# Altium PCB Jetson-CAN-Transceiver.PcbDoc
Units mil, origin at the board's own origin, x right, y up, seen from the top; angles counter-clockwise.
Board outline 1565 x 1060 mil, 2 copper layers (Top Layer, Bottom Layer); 22 components, 22 nets, 78 pads, 0 vias.
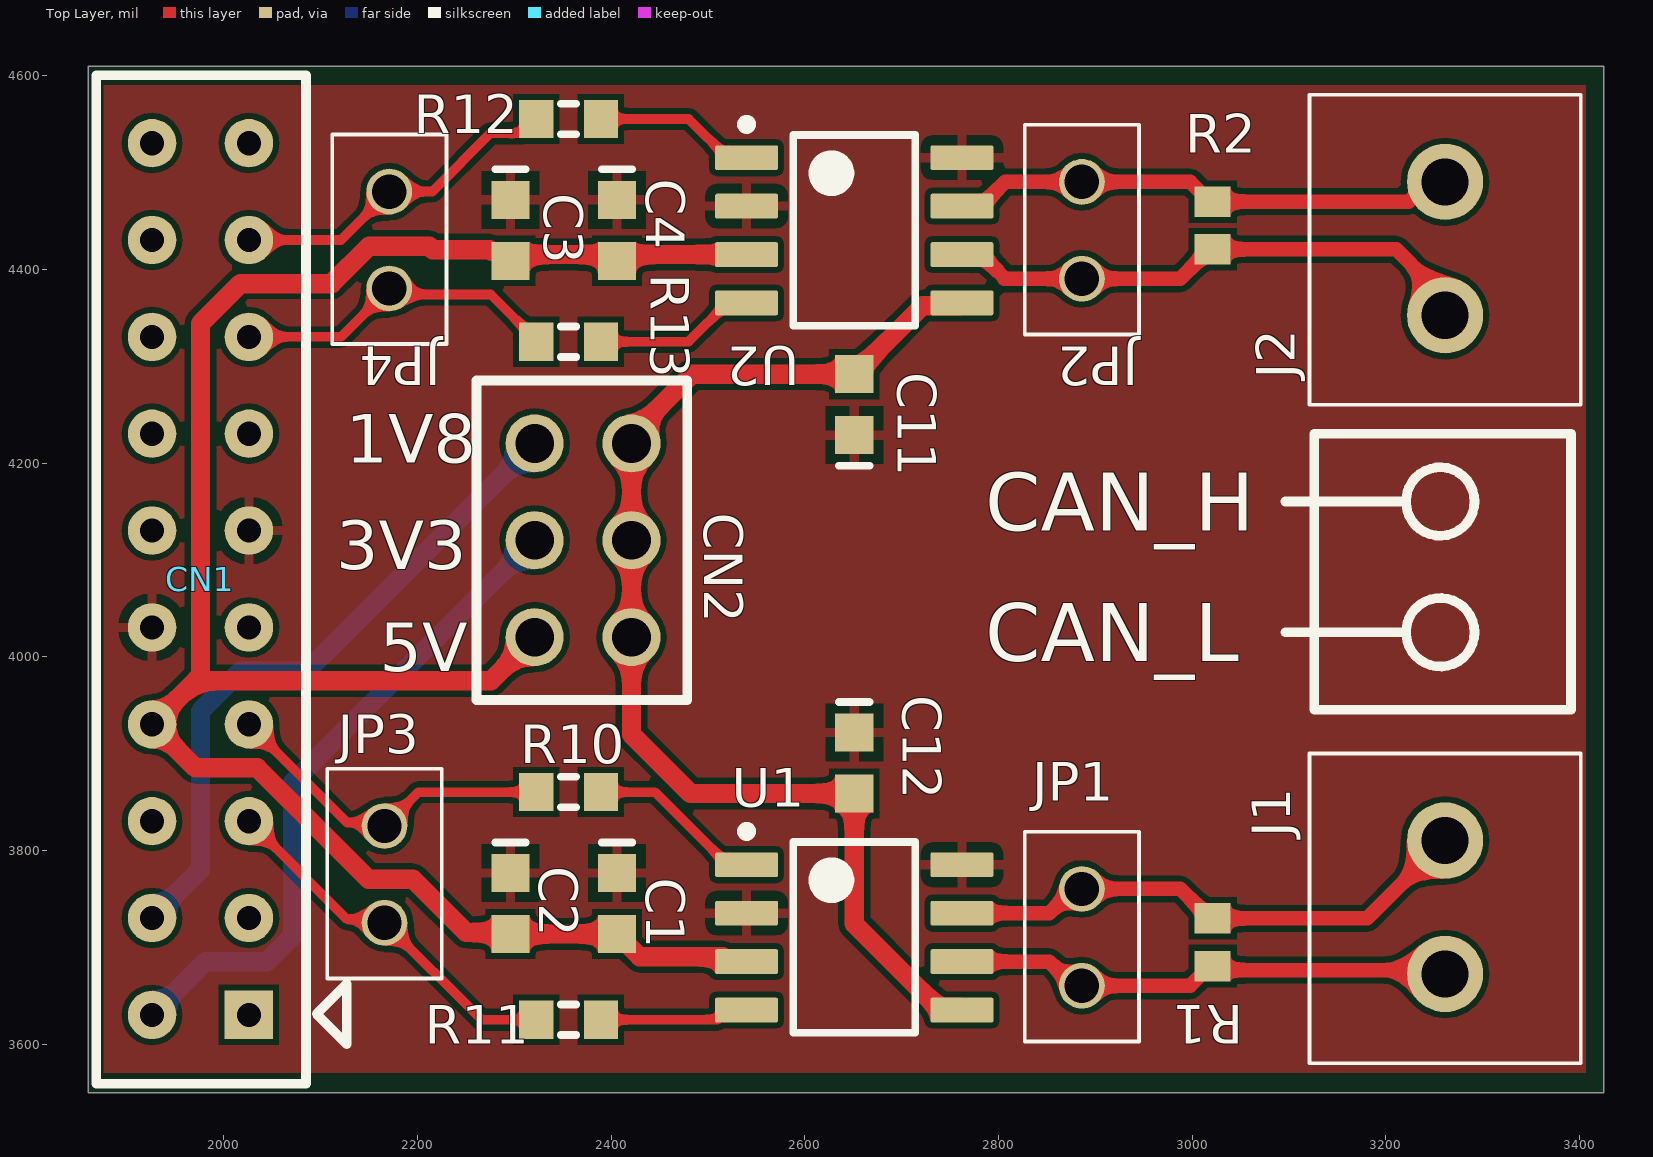
[diagram p0: Top Layer view]
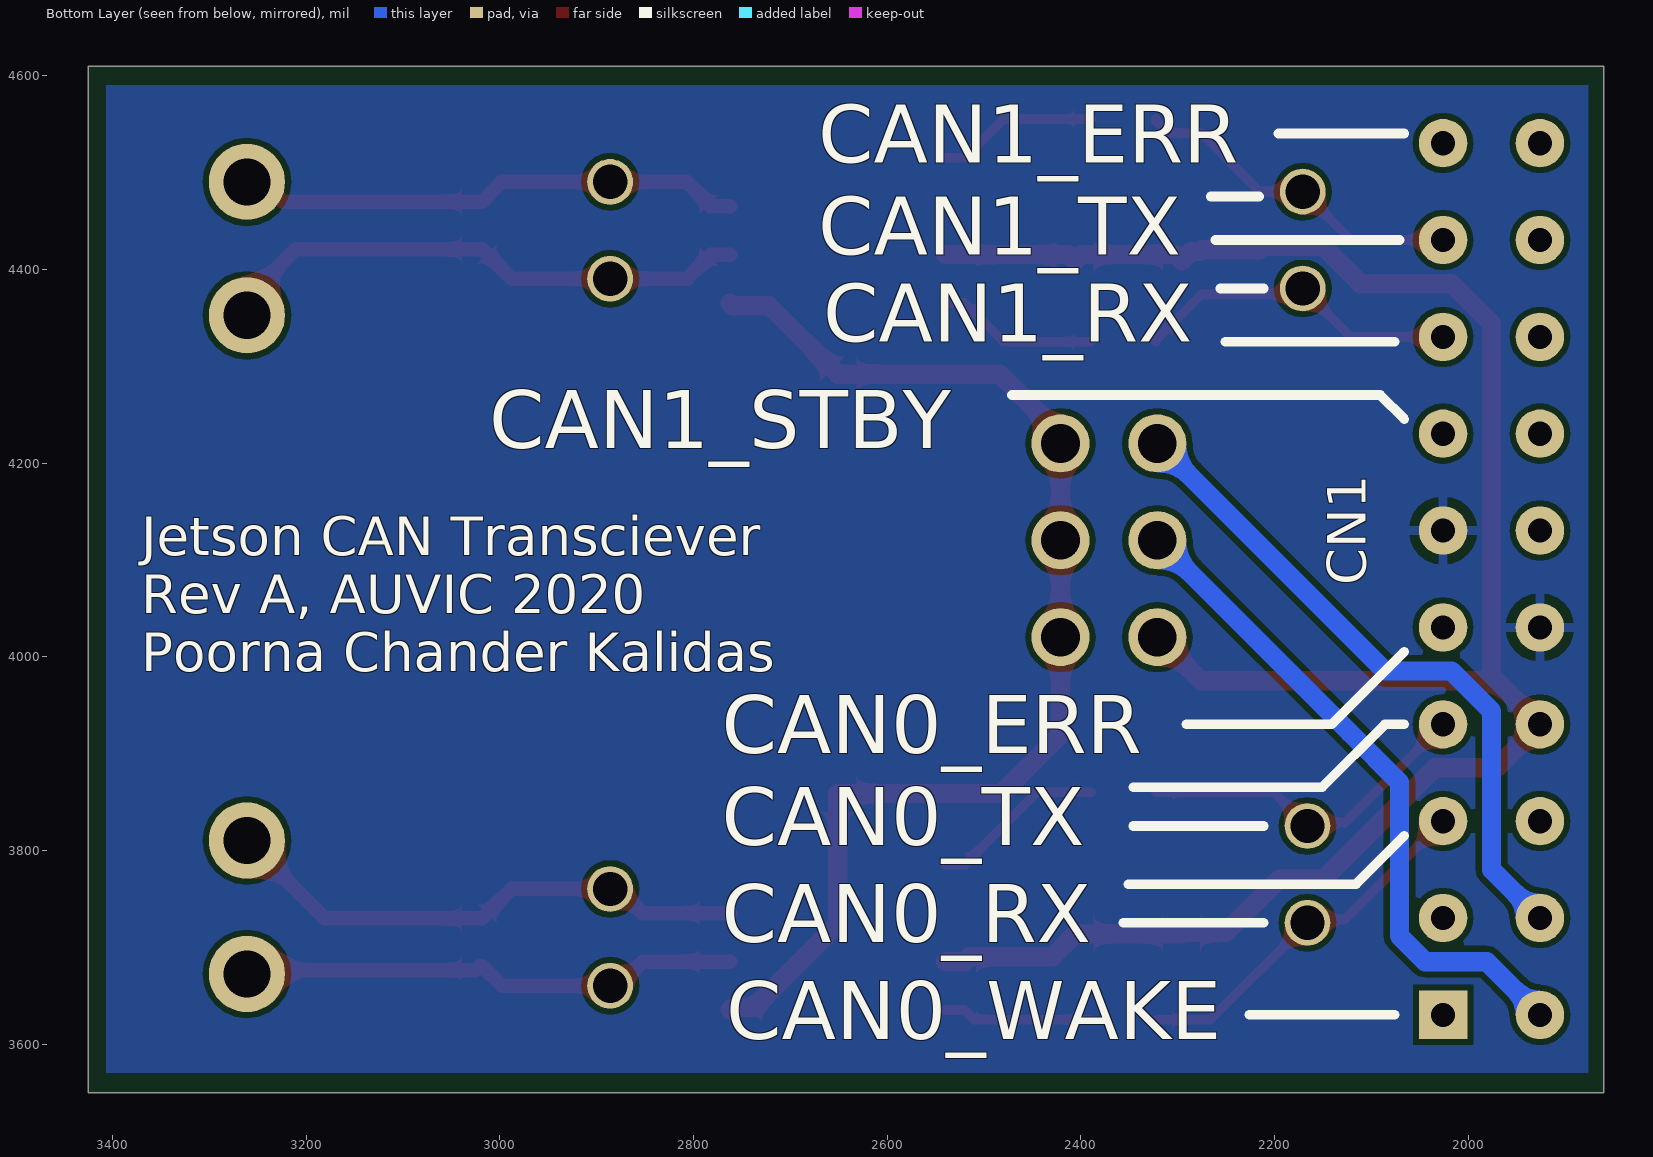
[diagram p1: Bottom Layer view, seen from below]

## Layer stack, top to bottom
Top Solder: solder mask 0.4, Solder Resist, Dk 3.5
Top Layer: signal copper 1.4
Dielectric 1: dielectric 12.6, FR-4, Dk 4.8
Bottom Layer: signal copper 1.4
Bottom Solder: solder mask 0.4, Solder Resist, Dk 3.5

## Board outline
1860,3550 3425,3550 3425,4610 1860,4610

## Design rules (kind name [scope] priority, off if disabled: settings)
Clearance [All] p1: gap=6 ignorepadtopadclearanceinfootprint=TRUE
DiffPairsRouting [All] p1: maxlimit=10 minlimit=10 mostfreqgap=10 toplayer_minwidth=15 toplayer_maxwidth=15 toplayer_prefwidth=15 bottomlayer_minwidth=15 bottomlayer_maxwidth=15 bottomlayer_prefwidth=15 maxuncoupledlength=500
PolygonConnect MotorPhaseA [All vs InNet('Phase_A_Out')] p1: connectstyle=Direct reliefconductorwidth=10 reliefentries=4 polygonreliefangle="90 Angle" airgapwidth=10
PolygonConnect SHUNT_HIGH_SIDE [All vs IsNamedPolygon('SHUNT_HIGH_SIDE')] p2: connectstyle=Direct reliefconductorwidth=10 reliefentries=4 polygonreliefangle="90 Angle" airgapwidth=10
PolygonConnect SHUNT_LOW_SIDE [All vs IsNamedPolygon('SHUNT_LOW_SIDE')] p3: connectstyle=Direct reliefconductorwidth=10 reliefentries=4 polygonreliefangle="90 Angle" airgapwidth=10
PolygonConnect NEG_BUS [All vs InNamedPolygon('NEG_BUS')] p4: thpad.connectstyle=Direct thpad.reliefconductorwidth=10 thpad.reliefentries=4 thpad.polygonreliefangle="90 Angle" thpad.airgapwidth=10 smdpad.connectstyle=Relief smdpad.reliefconductorwidth=10 smdpad.reliefentries=4 smdpad.polygonreliefangle="90 Angle" smdpad.airgapwidth=10 via.connectstyle=Direct via.reliefconductorwidth=10 via.reliefentries=4 via.polygonreliefangle="90 Angle" via.airgapwidth=10
PolygonConnect TOP_THERMAL_PAD [All vs IsNamedPolygon('TOP_THERMAL_PAD')] p5: connectstyle=Relief reliefconductorwidth=10 reliefentries=4 polygonreliefangle="90 Angle" airgapwidth=10
PolygonConnect Vin [All vs InNet('Vin')] p6: thpad.connectstyle=Direct thpad.reliefconductorwidth=10 thpad.reliefentries=4 thpad.polygonreliefangle="90 Angle" thpad.airgapwidth=10 smdpad.connectstyle=Relief smdpad.reliefconductorwidth=10 smdpad.reliefentries=4 smdpad.polygonreliefangle="90 Angle" smdpad.airgapwidth=10 via.connectstyle=Direct via.reliefconductorwidth=10 via.reliefentries=4 via.polygonreliefangle="90 Angle" via.airgapwidth=10
PolygonConnect MotorPhaseB [All vs InNet('Phase_B_Out')] p7: connectstyle=Direct reliefconductorwidth=10 reliefentries=4 polygonreliefangle="90 Angle" airgapwidth=10
PolygonConnect MotorPhaseC [All vs InNet('Phase_C_Out')] p8: connectstyle=Direct reliefconductorwidth=10 reliefentries=4 polygonreliefangle="90 Angle" airgapwidth=10
PolygonConnect [All] p9: thpad.connectstyle=Relief thpad.reliefconductorwidth=10 thpad.reliefentries=4 thpad.polygonreliefangle="90 Angle" thpad.airgapwidth=10 smdpad.connectstyle=Relief smdpad.reliefconductorwidth=10 smdpad.reliefentries=4 smdpad.polygonreliefangle="90 Angle" smdpad.airgapwidth=10 via.connectstyle=Direct via.reliefconductorwidth=10 via.reliefentries=4 via.polygonreliefangle="90 Angle" via.airgapwidth=10
RoutingVias [All] p1: holewidth=28 width=50 viastyle="Through Hole" minholewidth=28 minwidth=50 maxholewidth=28 maxwidth=50
SolderMaskExpansion [All] p1: expansion=4 istentingtop=FALSE
Width [All] p1: maxlimit=100 minlimit=10 preferedwidth=10
29 further rules are at their usual default settings.

## Classes and differential pairs
differential pair CAN1: +CAN1_P -CAN1_N
differential pair CAN0: +CAN0_P -CAN0_N

## Components (designator, comment, footprint, x,y, rotation, side; value= is the part's Value field where it differs from the comment)
C1 "1μF" "CAPC1608N(0603\")" 2406.03,3745.44 r270 top
C2 "0.1μF" "CAPC1608N(0603\")" 2296.03,3745.44 r270 top
C3 "1μF" "CAPC1608N(0603\")" 2296.03,4440.44 r270 top
C4 "0.1μF" "CAPC1608N(0603\")" 2406.03,4440.44 r270 top
C11 "0.1μF" "CAPC1608N(0603\")" 2651.03,4260.44 r90 top
C12 "0.1μF" "CAPC1608N(0603\")" 2651.03,3890.44 r270 top
CN1 "Header Female 2x10" "HEADER, FEMALE/MALE, 2x10, 100mil" 2026.03,3630.44 r180 top
CN2 "Header, Male, 2x3, Pitch: 0.1\" (2.54mm), THT" "Header, Male, 2x3, Pitch: 0.1\" (2.54mm),THT" 2321.03,4120.44 r90 top
J1 "2x1 Term Block" "2X1 Terminal Blocks" 3261.03,3810.44 r270 top
J2 "2x1 Term Block" "2X1 Terminal Blocks" 3261.03,4490.44 r270 top
JP1 "1X2 Pin Head" "2X1 Males Header" 2886.03,3760.44 r270 top
JP2 "1X2 Pin Head" "2X1 Males Header" 2886.03,4490.44 r270 top
JP3 "1X2 Pin Head" "2X1 Males Header" 2166.03,3825.44 r270 top
JP4 "1X2 Pin Head" "2X1 Males Header" 2171.03,4480.44 r270 top
R1 "CRCW0603120KFKEA" RESC1609X50X30NL10T20 3021.03,3705.44 r270 top
R2 "CRCW0603120KFKEA" RESC1609X50X30NL10T20 3021.03,4445.44 r270 top
R10 "1k" "RESC1608N(0603\")" 2356.03,3860.44 r0 top
R11 "1k" "RESC1608N(0603\")" 2356.03,3625.44 r0 top
R12 "1k" "RESC1608N(0603\")" 2356.03,4555.44 r0 top
R13 "1k" "RESC1608N(0603\")" 2356.03,4325.44 r0 top
U1 "TJA1042T/3,118" 8-SOIC 2651.03,3710.44 r0 top
U2 "TJA1042T/3,118" 8-SOIC 2651.03,4440.44 r0 top

## Footprints (in the part's own frame and the unit in brackets; to place one, negate y for a bottom-side part, rotate by r counter-clockwise, add the part's x,y. Pads: shape width x height; smd on the part's side, far side on the other; paste and mask are expansions set on the pad)
"2X1 Males Header" [mm]
  round 1.2 hole 0.9: 1(0,0) 2(2.54,0)
  silkscreen extent -1.5,-1.5 4,1.5, body extent -1.55,-1.55 4.05,1.55, height 1.27
"2X1 Terminal Blocks" [mm] "ED2740-ND"
  round 2 hole 1.24: 1(0,0) 2(3.5,0)
  silkscreen extent -2.29,-3.56 5.84,3.56, body extent -2.34,-3.61 5.89,3.61, height 1.27
8-SOIC [mm] "SOIC, 8-Leads, Body 5x4mm, Pitch 1.27mm, IPC Low Density"
  rrect15% 1.65x0.65 smd: 1(-2.825,1.905) 2(-2.825,0.635) 3(-2.825,-0.635) 4(-2.825,-1.905) 5(2.825,-1.905) 6(2.825,-0.635) 7(2.825,0.635) 8(2.825,1.905)
  silkscreen extent -2.95,-2.5 1.6,2.9, body extent -4.18,-3.02 4.17,3.03, height 1.75
"CAPC1608N(0603\")" [mm] "Chip Capacitor, Body 1.6x0.8mm (0603\"), IPC Medium Density"
  rect 1x1 smd: 1(-0.8,0) 2(0.8,0)
  silkscreen extent -1.6,-0.4 -1.6,0.4, body extent -1.7,-0.8 1.6,0.8, height 0.85
"HEADER, FEMALE/MALE, 2x10, 100mil" [mil]
  rect 50x50 hole 25: 1(0,0)
  round 50 hole 25: 2(100,0) 3(0,-100) 4(100,-100) 5(0,-200) 6(100,-200) 7(0,-300) 8(100,-300) 9(0,-400) 10(100,-400) 11(0,-500) 12(100,-500) 13(0,-600) 14(100,-600) 15(0,-700) 16(100,-700) 17(0,-800) 18(100,-800) 19(0,-900) 20(100,-900)
  silkscreen extent -101,-970 157,71, body extent -106,-975 162,76, height 50
"Header, Male, 2x3, Pitch: 0.1\" (2.54mm),THT" [mil]
  round 60 hole 40: 1(-100,0) 2(0,0) 3(100,0) 4(100,-100) 5(0,-100) 6(-100,-100)
  silkscreen extent -165,-157 165,60, body extent -170,-162 170,65, height 50
"RESC1608N(0603\")" [mm] "Chip Resistor, Body 1.6x0.8mm (0603\"), IPC Medium Density"
  rect 0.9x1 smd: 1(-0.85,0) 2(0.85,0)
  silkscreen extent -0.2,-0.4 0.2,0.4, body extent -1.6,-0.8 1.6,0.8, height 0.6
RESC1609X50X30NL10T20 [mm] "Chip Resistor, 2-Leads, Body 1.55x0.85mm, IPC Medium Density"
  rect 0.8x0.95 smd: 1(-0.625,0) 2(0.625,0)
  body extent -1.32,-0.77 1.32,0.77, height 0.5

## Part data
C1 C3: library part "1uF 50V 0603 SMD, Ceramic", "Capacitor, Ceramic, 50V, +/- 10%, 0603 SMD, X5R", Supplier Part Number 1=1276-1860-6-ND, Created By="Lyden Smith", Date Created=2017-10-26, PackageDescription="Chip Capacitor", Supplier 1=Digi-Key
C2 C4 C11 C12: library part "0.1uF 16V 0603 SMD, Ceramic", "Capacitor, Ceramic, 16V, +/- 10%, 0603 SMD, X7R", Supplier Part Number 1=1276-1005-1-ND, Created By="Andy Bates", PackageDescription="Chip Capacitor", Published=16-04-26, Publisher=AUVic, Supplier 1=Digi-Key
CN1: library part "Header, Female/Male, 2x10, THT, 100mil", "Header, Female with extended Male pins, 2x10, THT, 100mil", Supplier Part Number 1=SAM1204-10-ND, Created By="Poorna Chander Kalidas", Supplier 1=Digi-Key
J1 J2: library part "2x1 Terminal Block", Supplier Part Number 1=ED2740-ND, Made By="Andy Bates", Supplier 1=Digikey
JP1 JP2 JP3 JP4: library part "1x2 Male Header", Supplier 1 Part Number=952-3073-ND, Made By="Andy Bates", Supplier 1=Digikey
R1 R2: library part CMP-2000-03868-1, Manufacturer="Vishay Dale", Part Number=CRCW0603120KFKEA
R10 R11 R12 R13: library part "1kR, 1%, 1/10W , 0603, SMD", "1kR, 1%, 1/10W , 0603, SMD", Supplier Part Number 1=311-1.00KHRCT-ND, Created By="Andy Bates", Date Created=2017-05-10, Publisher=AUVic, Supplier 1=Digikey
U1 U2: library part "CAN Transceiver", "1/1 Transceiver Half CANbus 8-SO", Supplier Part Number 1=568-8678-1-ND, ComponentLink1Description=Digikey, ComponentLink1URL=https://www.digikey.ca/product-detail/en/texas-instruments/SN65HVD232DR/296-26344-1-ND/2254978, Made By="Poorna Chander Kalidas", Supplier 1=Digi-Key
CN2: Created By="Andy Bates", Date Published=2017-09-13, Publisher=AUVic

## Nets (pads, with @x,y where several pads share a name; then routed paths per layer and width w, separated by ;. In a path a pad name is that pad's centre, name@x,y a point inside that pad or via, vN(x,y) a via of type N, cw(c..) or ccw(c..) an arc to the next point about the centre after c; other vN are vias at no path point)
1V8: CN1.4 CN2.3 | length 693.8
  Bottom Layer w20: CN1.4 1976.03,3780.44 1976.03,3944.08 2017.39,3985.44 2086.03,3985.44 CN2.3
3V3: CN1.2 CN2.2 | length 690.9
  Bottom Layer w20: CN1.2 1981.03,3685.44 2044.67,3685.44 2071.03,3711.8 2071.03,3870.44 2122.41,3921.82 CN2.2
5V: C1.2 C2.2 C3.2 C4.2 CN1.8 CN2.1 U1.3 U2.3 | length 2115.3
  Top Layer w20: C3.2 2286.34,4418.63 2276.44,4418.63 2274.63,4420.44 2215.72,4420.44 2212.09,4424.06 2150.01,4424.06 2111.38,4385.44 2017.39,4385.44 1976.03,4344.08 1976.03,3980.44 1971.03,3975.44 ; C3.2@2302.53,4415.44 2399.53,4415.44 C4.2 2412.53,4415.44 U2.3 ; CN2.1 2276.03,3975.44 1971.03,3975.44 ; C1.2@2401.03,3713.95 C2.2 2294.53,3715.44 2250.38,3715.44 2195.38,3770.44 2149.67,3770.44 2034.67,3885.44 1971.03,3885.44 CN1.8 1971.03,3975.44 ; C1.2 2429.53,3690.44 2515.12,3690.44 2520.12,3685.44 U1.3
CAN0_ERR: CN1.9
CAN0_N: J1.2 JP1.2 R1.2 U1.6 | length 521
  Top Layer w15: U1.6 2852.3,3685.44 2877.3,3660.44 JP1.2 2997.68,3660.44 3018.08,3680.84 R1.2 3025.12,3676.74 3256.93,3676.74 J1.2
CAN0_P: J1.1 JP1.1 R1.1 U1.7 | length 555
  Top Layer w15: U1.7 2852.3,3735.44 2877.3,3760.44 JP1.1 2987.68,3760.44 3018.08,3730.05 R1.1 3180.64,3730.05 J1.1
CAN0_RX: CN1.5 JP3.2 R11.1 | length 381.4
  Top Layer w10: CN1.5 2127.41,3729.06 2162.41,3729.06 JP3.2 2266.03,3625.44 R11.1
CAN0_STBY: CN1.3
CAN0_TX: CN1.7 JP3.1 R10.1 | length 354.5
  Top Layer w10: CN1.7 2127.41,3829.06 2162.41,3829.06 JP3.1 2201.03,3860.44 R10.1
CAN1_ERR: CN1.19
CAN1_N: J2.2 JP2.2 R2.2 U2.6 | length 560.9
  Top Layer w15: U2.6 2781.93,4415.44 2806.15,4391.23 2806.15,4390.44 JP2.2 2987.68,4390.44 3018.08,4420.84 R2.2 3210.64,4420.84 3226.03,4405.44 3226.03,4404.89 3261.03,4369.89 J2.2
CAN1_P: J2.1 JP2.1 R2.1 U2.7 | length 526
  Top Layer w15: U2.7 2781.93,4465.44 2806.93,4490.44 JP2.1 2997.68,4490.44 3018.08,4470.05 3223.39,4470.05 3243.78,4490.44 J2.1
CAN1_RX: CN1.15 JP4.2 R13.1 | length 341.2
  Top Layer w10: CN1.15 2121.03,4330.44 JP4.2 2177.21,4374.26 2275.71,4374.26 2322.57,4327.41 R13.1
CAN1_STBY: CN1.13
CAN1_TX: CN1.17 JP4.1 R12.1 | length 349.5
  Top Layer w10: CN1.17 2121.03,4430.44 JP4.1 2215.32,4480.44 2275.64,4540.76 2309.85,4540.76 2322.57,4553.47 R12.1
CAN_WAKE: CN1.1
GND: C1.1 C2.1 C3.1 C4.1 C11.1 C12.1 CN1.10 CN1.11 U1.2 U1.8 U2.2 U2.8
NetR10_2: R10.2 U1.1 | length 181.4
  Top Layer w10: R10.2 2445.12,3860.44 2520.12,3785.44 U1.1
NetR11_2: R11.2 U1.4 | length 154.5
  Top Layer w10: R11.2 2510.12,3625.44 2520.12,3635.44 U1.4
NetR12_2: R12.2 U2.1 | length 166.9
  Top Layer w10: R12.2 2480.12,4555.44 2520.12,4515.44 U2.1
NetR13_2: R13.2 U2.4 | length 166.9
  Top Layer w10: R13.2 2480.12,4325.44 2520.12,4365.44 U2.4
VIO: C11.2 C12.2 CN2.4 CN2.5 CN2.6 U1.5 U2.5 | length 1245
  Top Layer w20: U1.5 2759.45,3638.24 2737.02,3638.24 2651.03,3724.23 C12.2 2481.98,3858.95 2421.03,3919.89 CN2.6 CN2.5 2421.03,4229.28 2483.69,4291.94 C11.2 2721.74,4362.65 2759.45,4362.65 U2.5
pads on no net: CN1.6 CN1.12 CN1.14 CN1.16 CN1.18 CN1.20

## Polygon pours and split planes (outlines as drawn)
no net on Top Layer "NONET_L01_P058" (solid, pour order 58): 2905,2210
GND on Top Layer "NONET_L01_P-001" (solid, pour order 78): 1876.03,4590.44 1876.03,3570.44 3406.03,3570.44 3406.03,4590.44
no net on Top Layer "NONET_L01_P043" (solid, pour order 43): 1950,1025
no net on Top Layer "NONET_L01_P041" (solid, pour order 41): 1917.68,1252.68
no net on Top Layer "NONET_L01_P040" (solid, pour order 40): 1910,1235
no net on Top Layer "NONET_L01_P039" (solid, pour order 39): 1950,1225
no net on Top Layer "NONET_L01_P001" (solid, pour order 1): 1250,1755
no net on Bottom Layer "NONET_L01_P-001" (solid, pour order 91): 3260,2620
no net on Bottom Layer "NONET_L02_P050" (solid, pour order 50): 2480,2180
no net on Bottom Layer "NONET_L02_P048" (solid, pour order 48): 2480,2180
no net on Bottom Layer "NONET_L02_P019" (solid, pour order 19): 1317.05,1706.85
no net on Bottom Layer "NONET_L02_P018" (solid, pour order 18): 1970,2240
GND on Bottom Layer "NONET_L01_P-001" (solid, pour order 79): 1876.03,4590.44 1876.03,3570.44 3406.03,3570.44 3406.03,4590.44
no net on Bottom Layer "NONET_L02_P020" (solid, pour order 20): 1260,1705

## Silkscreen, mask and mechanical layers (free items; w line width, h text height)
Top Overlay:
  circle w10: c3256.03,4025.44 r35.36
  circle w10: c3256.03,4160.44 r35.36
  lines w10: 3096.03,4025.44 3221.03,4025.44 ; 3096.03,4160.44 3216.03,4160.44 ; 3126.03,3945.44 3391.03,3945.44 3391.03,4230.44 3126.03,4230.44 3126.03,3945.44
  text "1V8" at 2126.03,4200.44 h50
  text "CAN_H" at 2786.03,4130.44 h60
  text "3V3" at 2116.03,4090.44 h50
  text "CAN_L" at 2786.03,3995.44 h60
  text "5V" at 2161.03,3985.44 h50
Bottom Overlay:
  lines w10: 2066.03,3815.44 2116.03,3765.44 2351.03,3765.44 ; 2066.03,3930.44 2086.03,3930.44 2151.03,3865.44 2346.03,3865.44 ; 2066.03,4005.44 2141.03,3930.44 2291.03,3930.44 ; 2066.03,4245.44 2091.03,4270.44 2096.03,4270.44 2471.03,4270.44 ; 2066.03,4540.44 2196.03,4540.44 ; 2071.03,4430.44 2261.03,4430.44 ; 2076.03,3630.44 2226.03,3630.44 ; 2076.03,4325.44 2251.03,4325.44 ; 2211.03,3725.44 2356.03,3725.44 ; 2211.03,3825.44 2346.03,3825.44 ; 2211.03,4380.44 2256.03,4380.44 ; 2216.03,4475.44 2266.03,4475.44
  text "CAN1_ERR" at 2671.03,4510.44 h60
  text "CAN1_TX" at 2671.03,4415.44 h60
  text "CAN1_RX" at 2666.03,4325.44 h60
  text "CAN1_STBY" at 3011.03,4215.44 h60
  text "Jetson CAN Transciever / Rev A, AUVIC 2020 / Poorna Chander Kalidas" at 3370,3985 h40
  text "CAN0_ERR" at 2771.03,3900.44 h60
  text "CAN0_TX" at 2771.03,3805.44 h60
  text "CAN0_RX" at 2771.03,3705.44 h60
  text "CAN0_WAKE" at 2766.03,3605.44 h60
Mechanical 1:
  the board outline again, w10